# Altium PCB Main2.PcbDoc
Units mil, origin at the board's own origin, x right, y up, seen from the top; angles counter-clockwise.
Board outline 3180 x 2805 mil, 2 copper layers (Top Layer, Bottom Layer); 12 components, 11 nets, 65 pads, 0 vias.
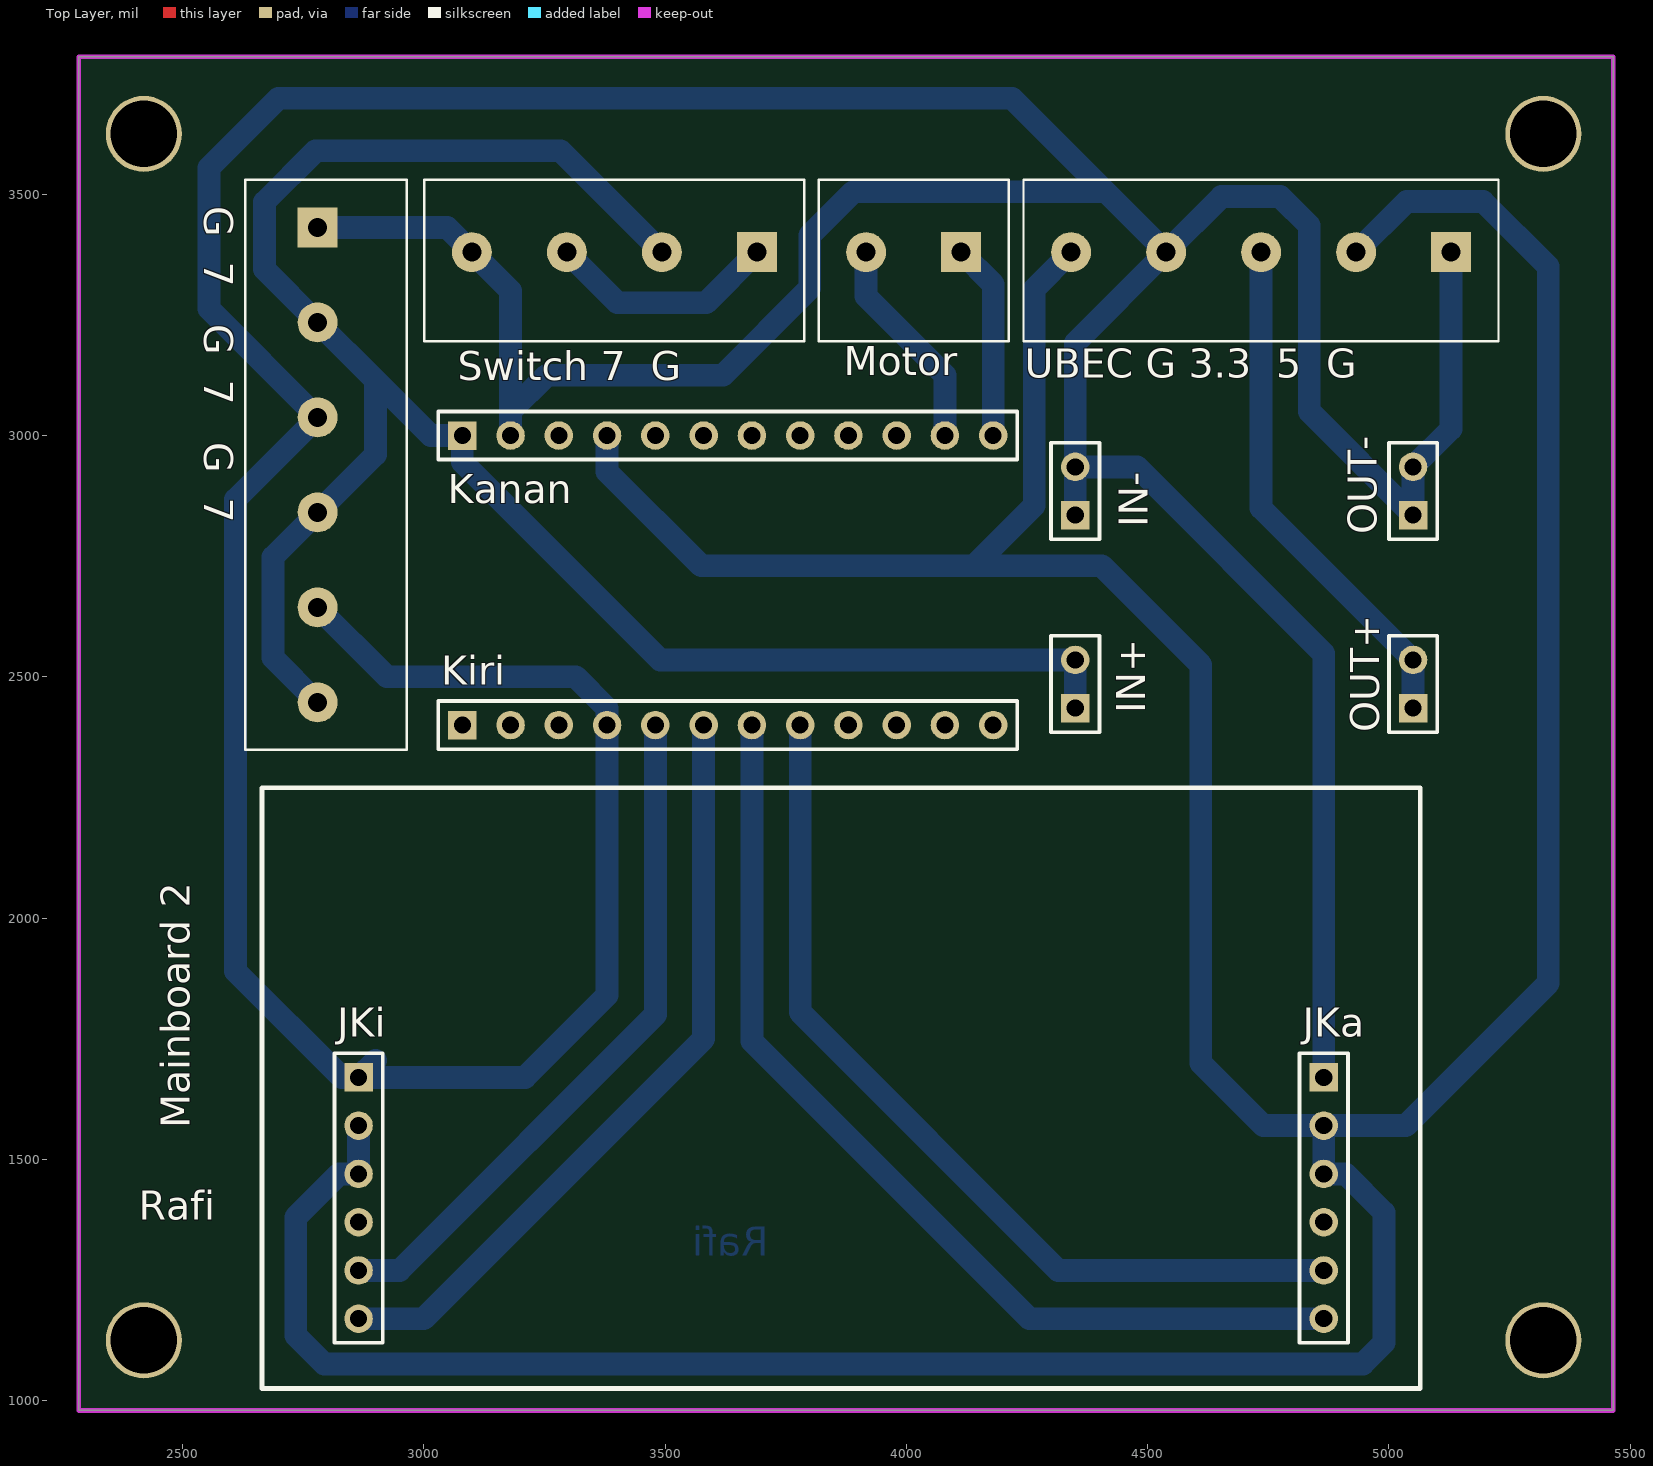
[diagram p0: Top Layer view]
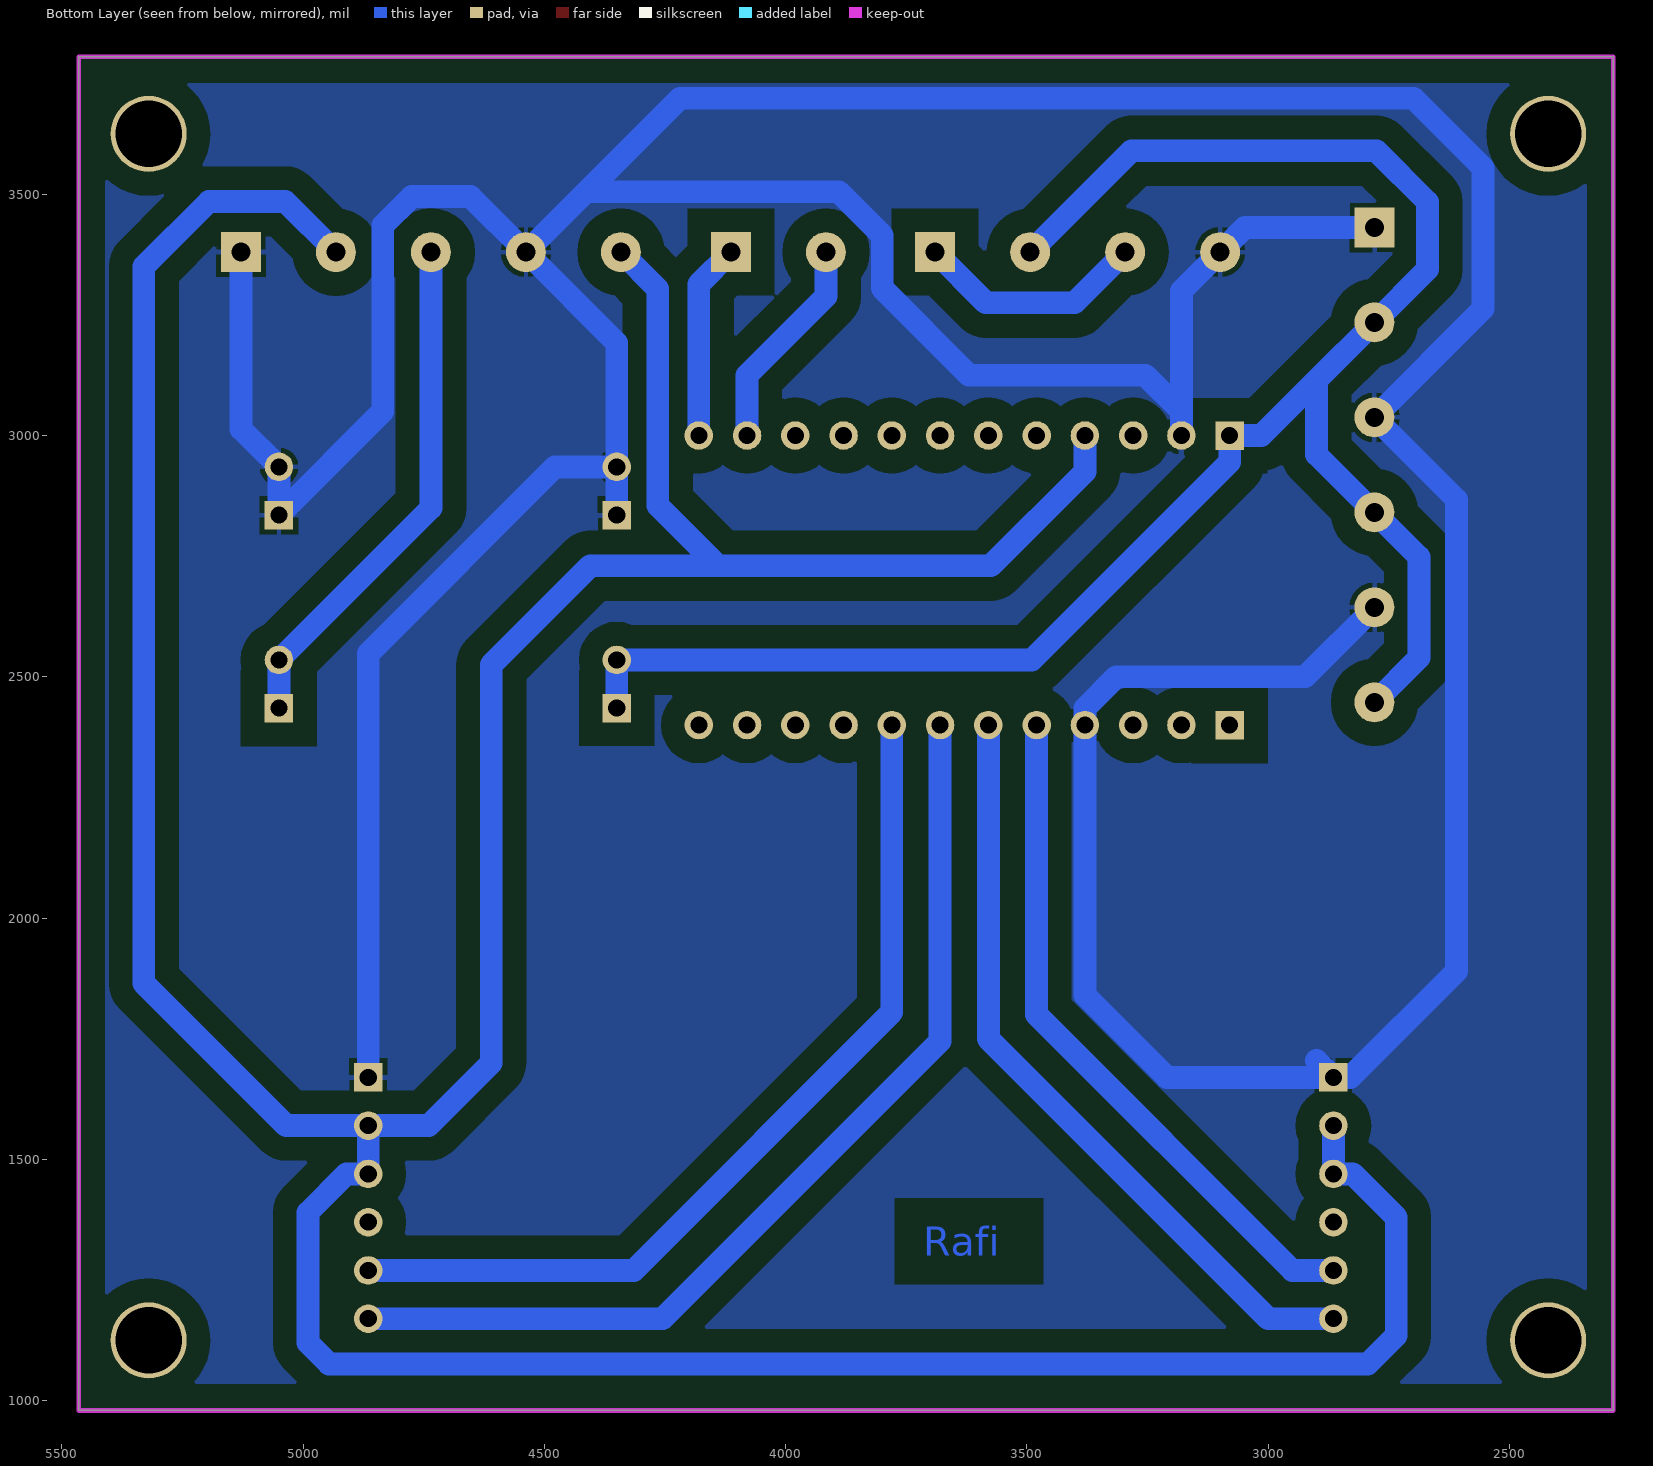
[diagram p1: Bottom Layer view, seen from below]

## Layer stack, top to bottom
Top Solder: solder mask 0.4, Solder Resist, Dk 3.5
Top Layer: signal copper 1.4
Dielectric 1: dielectric 12.6, FR-4, Dk 4.8
Bottom Layer: signal copper 1.4
Bottom Solder: solder mask 0.4, Solder Resist, Dk 3.5

## Board outline
2285,980 2285,3785 5465,3785 5465,980

## Design rules (kind name [scope] priority, off if disabled: settings)
Clearance [All] p1: gap=27.56
PolygonConnect [All] p1: connectstyle=Relief reliefconductorwidth=10 reliefentries=4 polygonreliefangle="90 Angle" airgapwidth=10
RoutingVias [All] p1: holewidth=28 width=50 viastyle="Through Hole" minholewidth=28 minwidth=50 maxholewidth=28 maxwidth=50
SolderMaskExpansion [All] p1: expansion=4
Width [All] p1: maxlimit=47.24 minlimit=39.37 preferedwidth=39.37
30 further rules are at their usual default settings.

## Components (designator, comment, footprint, x,y, rotation, side; value= is the part's Value field where it differs from the comment)
"G  7   G  7   G  7" "WE-Terminal Blocks Plugable Type 691311700006" 691311700006 2780,2939.11 r270 top (schematic designator "Out 7V")
IN+ "Header 2" HDR1X2 4350,2435 r90 top
IN- "Header 2" HDR1X2 4350,2835 r90 top
JKa "Header 6" HDR1X6 4865,1670 r270 top
JKi "Header 6" HDR1X6 2865,1670 r270 top
Kanan "Header 12" HDR1X12 3080,3000 r0 top
Kiri "Header 12" HDR1X12 3080,2400 r0 top
Motor "WE-Terminal Blocks Plugable Type 691311700002" 691311700002 4015,3380.06 r180 top
OUT+ "Header 2" HDR1X2 5050,2435 r90 top
OUT- "Header 2" HDR1X2 5050,2835 r90 top
"Switch 7  G" "WE-Terminal Blocks Plugable Type 691311700004" 691311700004 3395,3380.05 r180 top (schematic designator "Source n Saklar")
"UBEC G 3.3  5  G" "WE-Terminal Blocks Plugable Type 691311700005" 691311700005 4735,3380.05 r180 top (schematic designator "Out n Ubec5 In")

## Footprints (in the part's own frame and the unit in brackets; to place one, negate y for a bottom-side part, rotate by r counter-clockwise, add the part's x,y. Pads: shape width x height; smd on the part's side, far side on the other; paste and mask are expansions set on the pad)
691311700002 [mm] "5.00mm - Open Vertical PCB Header - 02p"
  rect 2.1x2.1 hole 1: 1(-2.5,0)
  round 2.1 hole 1: 2(2.5,0)
  silkscreen extent -5,-3.8 5,4.7, body extent -5,-3.8 5,4.7, height 12.01
691311700004 [mm] "5.00mm - Open Vertical PCB Header - 04p"
  rect 2.1x2.1 hole 1: 1(-7.5,0)
  round 2.1 hole 1: 2(-2.5,0) 3(2.5,0) 4(7.5,0)
  silkscreen extent -10,-3.8 10,4.7, body extent -10,-3.8 10,4.7, height 12.01
691311700005 [mm] "5.00mm - Open Vertical PCB Header - 05p"
  rect 2.1x2.1 hole 1: 1(-10,0)
  round 2.1 hole 1: 2(-5,0) 3(0,0) 4(5,0) 5(10,0)
  silkscreen extent -12.5,-3.8 12.5,4.7, body extent -12.5,-3.8 12.5,4.7, height 12.01
691311700006 [mm] "5.00mm - Open Vertical PCB Header - 06p"
  rect 2.1x2.1 hole 1: 1(-12.5,0)
  round 2.1 hole 1: 2(-7.5,0) 3(-2.5,0) 4(2.5,0) 5(7.5,0) 6(12.5,0)
  silkscreen extent -15,-3.8 15,4.7, body extent -15,-3.8 15,4.7, height 12.01
HDR1X2 [mm] "Connector; Header; 2 Position"
  rect 1.5x1.5 hole 0.9: 1(0,0)
  round 1.5 hole 0.9: 2(2.54,0)
  silkscreen extent -1.27,-1.27 3.81,1.27
HDR1X6 [mm] "Connector; Header; 6 Position"
  rect 1.5x1.5 hole 0.9: 1(0,0)
  round 1.5 hole 0.9: 2(2.54,0) 3(5.08,0) 4(7.62,0) 5(10.16,0) 6(12.7,0)
  silkscreen extent -1.27,-1.27 13.97,1.27
HDR1X12 [mm] "Connector; Header; 12 Position"
  rect 1.5x1.5 hole 0.9: 1(0,0)
  round 1.5 hole 0.9: 2(2.54,0) 3(5.08,0) 4(7.62,0) 5(10.16,0) 6(12.7,0) 7(15.24,0) 8(17.78,0) 9(20.32,0) 10(22.86,0) 11(25.4,0) 12(27.94,0)
  silkscreen extent -1.27,-1.27 29.21,1.27

## Part data
"G  7   G  7   G  7" Motor "Switch 7  G" "UBEC G 3.3  5  G": "WR-TBL Terminal block - serie 3117 - 5.00mm"
IN+ IN- OUT+ OUT-: "Header, 2-Pin"
JKa JKi: "Header, 6-Pin"
Kanan Kiri: "Header, 12-Pin"

## Free pads (board coordinates)
  round 157.48 hole 137.8: 0(2420,1125) 0(2420,3625) 0(5320,1125) 0(5320,3625)

## Nets (pads, with @x,y where several pads share a name; then routed paths per layer and width w, separated by ;. In a path a pad name is that pad's centre, name@x,y a point inside that pad or via, vN(x,y) a via of type N, cw(c..) or ccw(c..) an arc to the next point about the centre after c; other vN are vias at no path point)
3.3: "UBEC G 3.3  5  G.3" OUT+.1 OUT+.2 | length 1075.5
  Bottom Layer w47.24: 4735,3380.06 4735,2850 OUT+.2 OUT+.1
5: "UBEC G 3.3  5  G.2" "UBEC G 3.3  5  G.5" JKa.2 JKa.3 JKi.2 JKi.3 Kanan.4 | length 9245.8
  Bottom Layer w47.24: JKi.2 JKi.3 2825,1470 2735,1380 2735,1135 2794,1076 4946,1076 4990,1120 4990,1390 4910,1470 JKa.3 JKa.2 ; Kanan.4 3380,2925 3575,2730 4405,2730 4610,2525 4610,1700 4740,1570 JKa.2 ; 4140,2730 4265,2855 4265,3303.76 4341.3,3380.06 ; 4931.85,3380.06 5036.79,3485 5195,3485 5330,3350 5330,1865 5035,1570 JKa.2
7: "G  7   G  7   G  7.2" "G  7   G  7   G  7.4" "G  7   G  7   G  7.6" "Switch 7  G.2" IN+.1 IN+.2 Kanan.1 | length 4204.8
  Bottom Layer w47.24: 2780,2446.98 2687.48,2539.5 2687.48,2748.16 2780,2840.68 2900,2960.68 2900,3114.39 2780,3234.39 ; 3493.43,3380.06 3283.48,3590 2776,3590 2670,3484 2670,3344.39 2780,3234.39 ; IN+.1 IN+.2 3490,2535 3080,2945 Kanan.1 3014.39,3000 2780,3234.39
GND: "G  7   G  7   G  7.1" "G  7   G  7   G  7.3" "G  7   G  7   G  7.5" "Switch 7  G.4" "UBEC G 3.3  5  G.1" "UBEC G 3.3  5  G.4" IN-.1 IN-.2 JKa.1 JKi.1 Kanan.2 Kiri.4 OUT-.1 OUT-.2 | length 12318.7
  Bottom Layer w47.24: 2780,2643.83 2923.83,2500 3315,2500 3380,2435 Kiri.4 3380,1840 3210,1670 JKi.1 ; 2780,3431.24 3048.55,3431.24 3099.73,3380.06 3180,3299.78 3180,3050 ; 2900,1705 JKi.1 ; Kanan.2 3180,3050 ; IN-.1 IN-.2 ; 4413.21,3505 3890,3505 3800,3415 3800,3305 3620,3125 3255,3125 3180,3050 ; JKa.1 4865,2548 4478,2935 IN-.2 ; 5128.7,3380.06 5128.7,3013.7 OUT-.2 OUT-.1 4835,3050 4835,3435 4775,3495 4653.09,3495 4538.15,3380.06 ; JKi.1 2830,1670 2610,1890 2610,2867.54 2780,3037.54 2555,3262.54 2555,3555 2699,3699 4219.21,3699 4538.15,3380.06 ; IN-.2 4350,3191.91 4538.15,3380.06
GNDS: "Switch 7  G.1" "Switch 7  G.3" | length 480.7
  Bottom Layer w47.24: 3296.58,3380.06 3401.63,3275 3585.22,3275 3690.28,3380.06
NetJKa_5: JKa.5 Kiri.8 | length 1901.6
  Bottom Layer w47.24: Kiri.8 3780,1805 4315,1270 JKa.5
NetJKa_6: JKa.6 Kiri.7 | length 2078.2
  Bottom Layer w47.24: Kiri.7 3680,1745 4255,1170 JKa.6
NetJKi_5: JKi.5 Kiri.5 | length 1434.5
  Bottom Layer w47.24: JKi.5 2950,1270 3480,1800 Kiri.5
NetJKi_6: JKi.6 Kiri.6 | length 1605.2
  Bottom Layer w47.24: JKi.6 3000,1170 3580,1750 Kiri.6
NetKanan_11: Kanan.11 Motor.2 | length 447.7
  Bottom Layer w47.24: Motor.2 3916.58,3288.42 4080,3125 Kanan.11
NetKanan_12: Kanan.12 Motor.1 | length 407.6
  Bottom Layer w47.24: Motor.1 4180,3313.48 Kanan.12
pads on no net: JKa.4 JKi.4 Kanan.3 Kanan.5 Kanan.6 Kanan.7 Kanan.8 Kanan.9 Kanan.10 Kiri.1 Kiri.2 Kiri.3 Kiri.9 Kiri.10 Kiri.11 Kiri.12

## Polygon pours and split planes (outlines as drawn)
GND on Bottom Layer "Bottom Layer-GND" (solid, pour order 15): 2285,980 2285,3785 5465,3785 5465,980 2285,980

## Keep-outs
Keep-Out Layer:
  the board outline again, w10

## Other copper
Bottom Layer:
  text "Rafi" at 3715,1300 h60

## Silkscreen, mask and mechanical layers (free items; w line width, h text height)
Top Overlay:
  lines w10: 2665,1025 2665,2270 5065,2270 5065,1025 2665,1025
  text "Mainboard 2" at 2515,1565 h60 r90
  text "Rafi" at 2410,1375 h60

## Dimensions
2285,3785 to 5465,3785 on Bottom Layer
2285,3785 to 2285,980 on Bottom Layer